# Altium PCB Rectangle.PcbDoc
Units mm, origin at the board's own origin, x right, y up, seen from the top; angles counter-clockwise.
Board outline 99.95 x 57.91 mm, 2 copper layers (Top Layer, Bottom Layer); 6 components, 22 nets, 52 pads, 26 vias.
Unrouted connection lines stored in the file: 2.
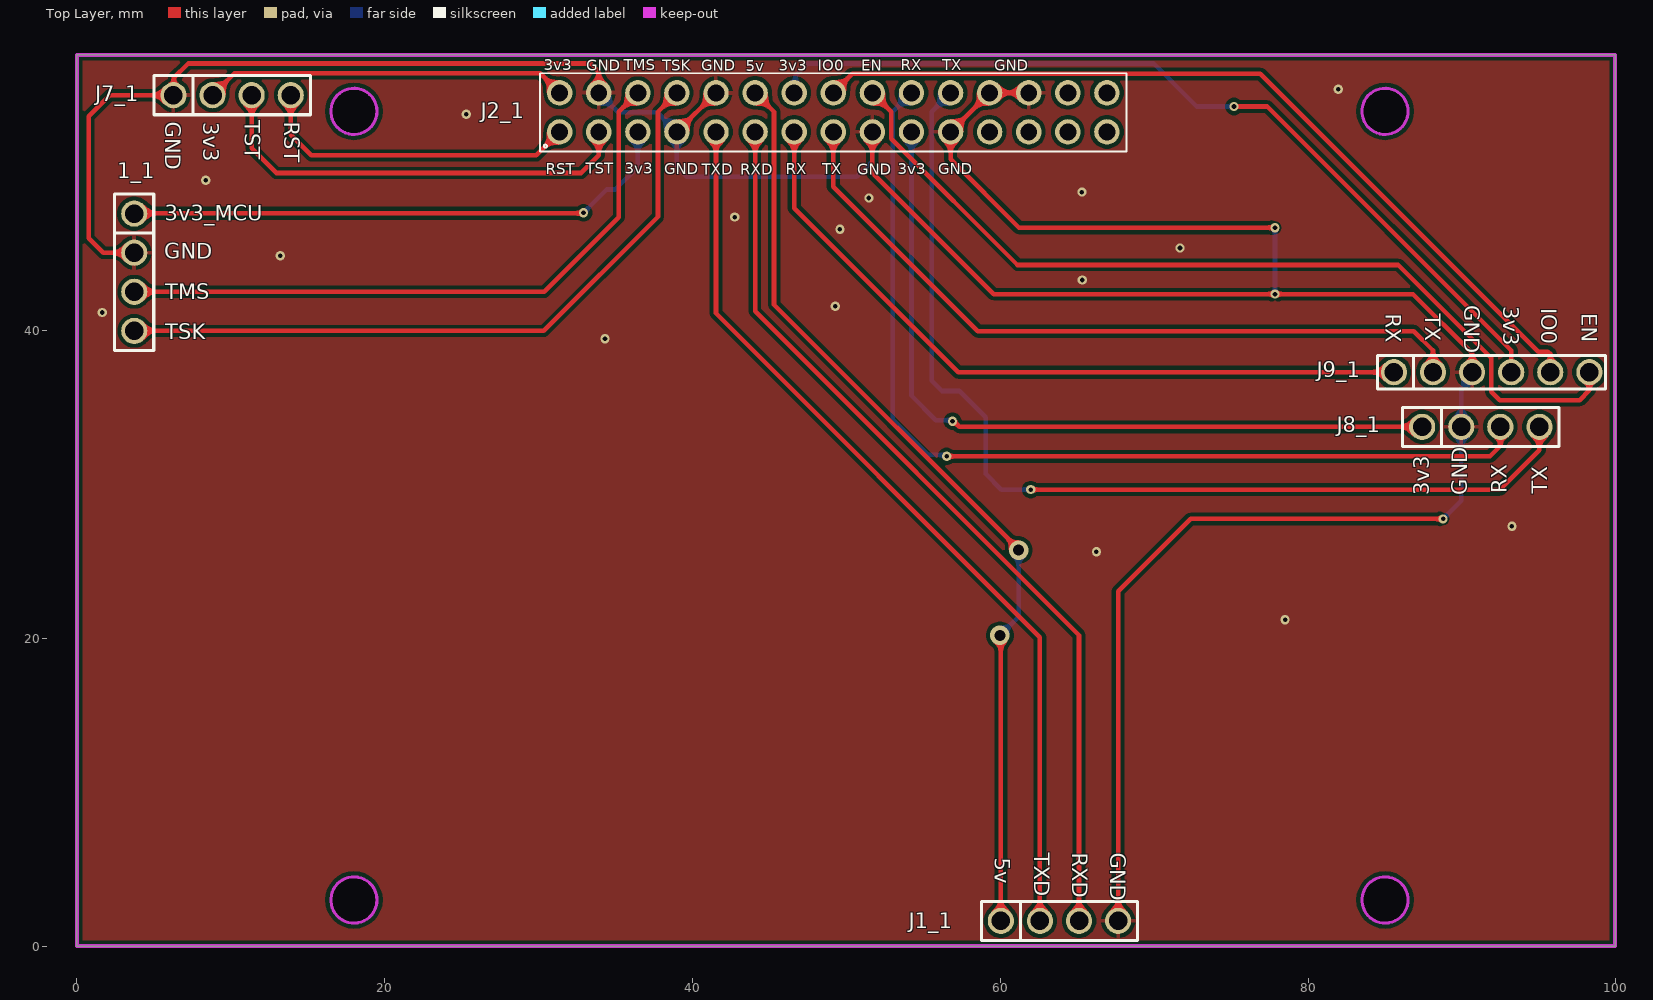
[diagram p0: Top Layer view]
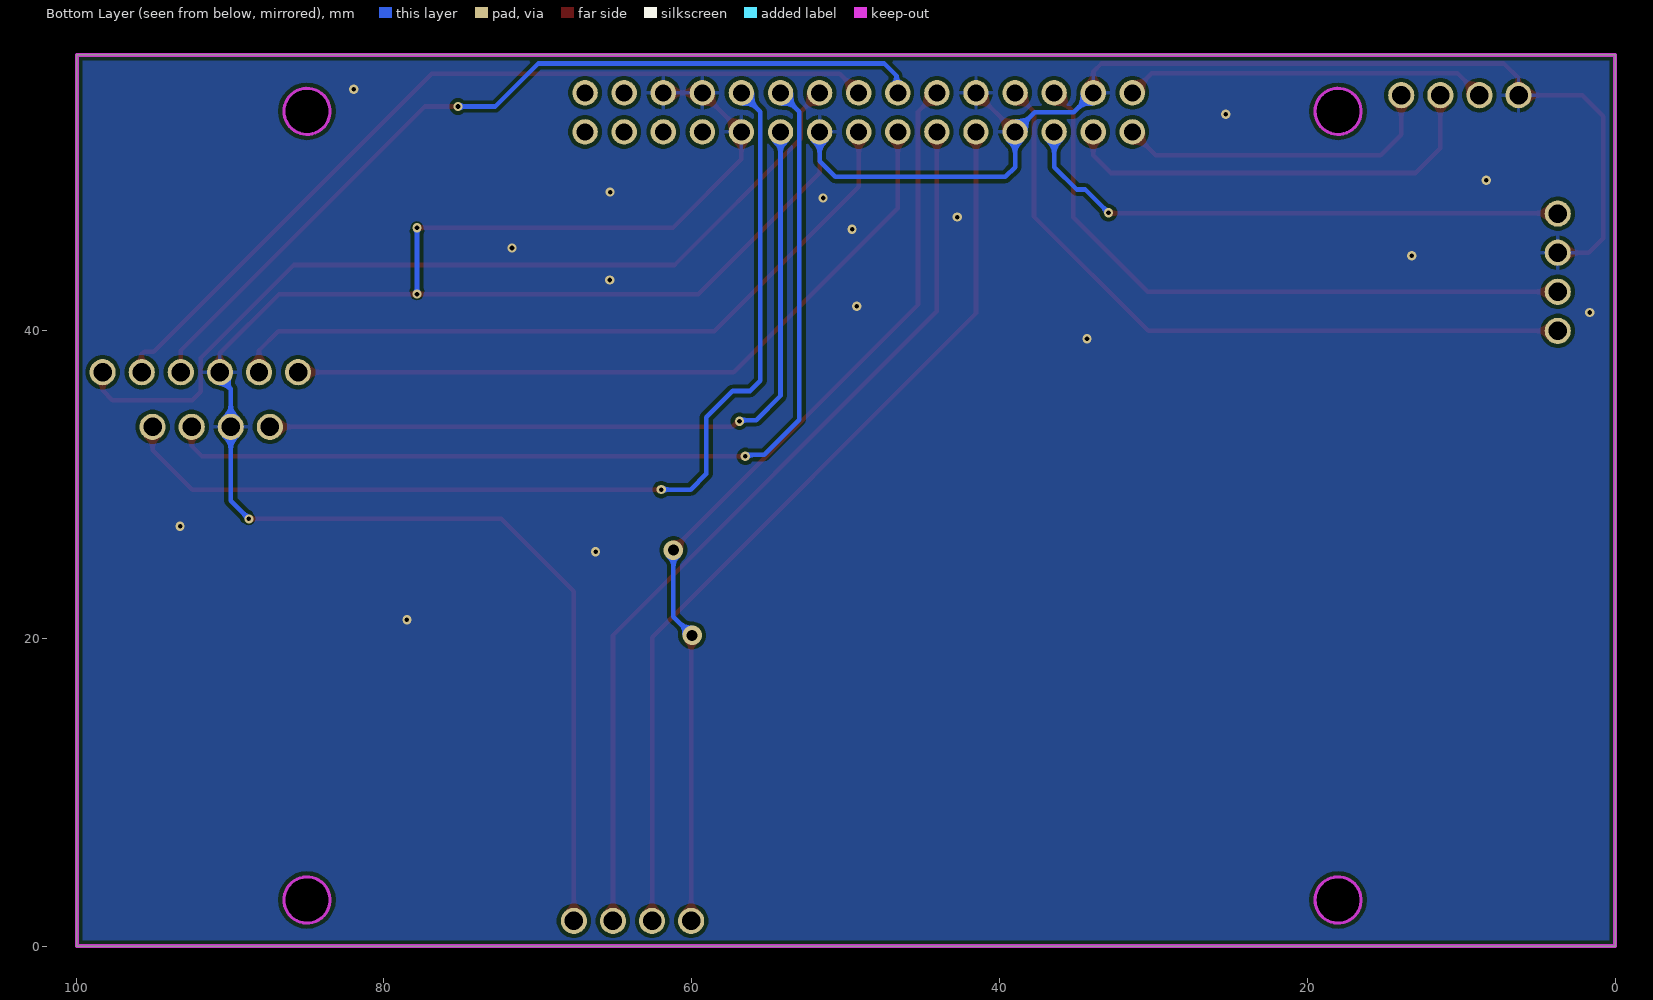
[diagram p1: Bottom Layer view, seen from below]

## Layer stack, top to bottom
Top Solder: solder mask 0.0102, Solder Resist, Dk 3.5
Top Layer: signal copper 0.0356
Dielectric 1: dielectric 0.32, FR-4, Dk 4.8
Bottom Layer: signal copper 0.0356
Bottom Solder: solder mask 0.0102, Solder Resist, Dk 3.5

## Board outline
0,0 0,57.912 99.949,57.912 99.949,0
cut-out: 18,52.745 cw(c18,54.245) 16.5,54.245 cw(c18,54.245) 18,55.745 cw(c18,54.245) 19.5,54.245 cw(c18,54.245)
cut-out: 16.5,3 ccw(c18,3) 18,1.5 ccw(c18,3) 19.5,3 ccw(c18,3) 18,4.5 ccw(c18,3)
cut-out: 83.5,54.245 ccw(c85,54.245) 85,52.745 ccw(c85,54.245) 86.5,54.245 ccw(c85,54.245) 85,55.745 ccw(c85,54.245)
cut-out: 83.5,3 ccw(c85,3) 85,1.5 ccw(c85,3) 86.5,3 ccw(c85,3) 85,4.5 ccw(c85,3)

## Design rules (kind name [scope] priority, off if disabled: settings)
Clearance [All] p1: gap=0.254 ignorepadtopadclearanceinfootprint=FALSE except(0: Arc-Hole Track-Hole SMDPad-Hole THPad-Hole Via-Hole Fill-Hole Poly-Hole Region-Hole Text-Hole)
PolygonConnect [All] p1: thpad.connectstyle=Relief thpad.reliefconductorwidth=0.254 thpad.reliefentries=4 thpad.polygonreliefangle="90 Angle" thpad.airgapwidth=0.254 smdpad.connectstyle=Relief smdpad.reliefconductorwidth=0.254 smdpad.reliefentries=4 smdpad.polygonreliefangle="90 Angle" smdpad.airgapwidth=0.254 via.connectstyle=Direct via.reliefconductorwidth=0.254 via.reliefentries=4 via.polygonreliefangle="90 Angle" via.airgapwidth=0.254
RoutingVias [All] p1: holewidth=0.711 width=1.27 viastyle="Through Hole" minholewidth=0.711 minwidth=1.27 maxholewidth=0.711 maxwidth=1.27
SolderMaskExpansion [All] p1: expansion=0.102 istentingtop=FALSE
Width [All] p1: maxlimit=1 minlimit=0.3 preferedwidth=0.3
30 further rules are at their usual default settings.

## Classes and differential pairs
component class Sheet1: J0 U1

## Components (designator, comment, footprint, x,y, rotation, side; value= is the part's Value field where it differs from the comment)
1_1 "J" J4 3.726,47.598 r270 top
J1_1 "J" J4 60.036,1.643 r0 top
J2_1 "61303021121" 61303021121 49.149,54.178 r0 top
J7_1 "J" J4 6.276,55.293 r0 top
J8_1 "J" J4 87.411,33.743 r0 top
J9_1 "J" J6 85.576,37.293 r0 top

## Footprints (in the part's own frame and the unit in brackets; to place one, negate y for a bottom-side part, rotate by r counter-clockwise, add the part's x,y. Pads: shape width x height; smd on the part's side, far side on the other; paste and mask are expansions set on the pad)
61303021121 [mm]
  round 1.65 hole 1.1: 1(-17.78,-1.27) 2(-17.78,1.27) 3(-15.24,-1.27) 4(-15.24,1.27) 5(-12.7,-1.27) 6(-12.7,1.27) 7(-10.16,-1.27) 8(-10.16,1.27) 9(-7.62,-1.27) 10(-7.62,1.27) 11(-5.08,-1.27) 12(-5.08,1.27) 13(-2.54,-1.27) 14(-2.54,1.27) 15(0,-1.27) 16(0,1.27) 17(2.54,-1.27) 18(2.54,1.27) 19(5.08,-1.27) 20(5.08,1.27) 21(7.62,-1.27) 22(7.62,1.27) 23(10.16,-1.27) 24(10.16,1.27) 25(12.7,-1.27) 26(12.7,1.27) 27(15.24,-1.27) 28(15.24,1.27) 29(17.78,-1.27) 30(17.78,1.27)
  silkscreen extent -19.05,-2.54 19.05,2.54
J4 [mm]
  round 1.7 hole 1.2: 1(0,0) 2(2.54,0) 3(5.08,0) 4(7.62,0)
  Bottom Layer lines w0.3: 7.617,0.09 7.617,0.284
  Bottom Layer lines w0.4: -0.033,0.065 0,0.099
  silkscreen extent -1.27,-1.27 8.89,1.27
J6 [mm]
  round 1.7 hole 1.2: 1(0,0) 2(2.54,0) 3(5.08,0) 4(7.62,0) 5(10.16,0) 6(12.7,0)
  Top Layer lines w0.2: 10.182,0.103 10.16,0.125 10.182,0.103 ; 10.182,0.103 10.223,0.063 ; 10.182,0.103 10.223,0.063 ; 10.223,0.063 10.277,0.008 10.223,0.063 ; 10.223,0.063 10.223,0.063 ; 10.223,0.063 10.223,0.063 ; 12.727,0 12.727,-0.042 12.727,0 ; 12.727,0 12.727,0.015 12.727,0
  silkscreen extent -1.07,-1.09 13.74,1.09

## Part data
1_1 J1_1 J7_1 J8_1: library part J4
J2_1: "<b> WR-PHD 2.54mm Dual Pin Header, 30 Pins </b>=>Code : Con_BTB_PHD_2.54_2_61303021121 <br><a href=\"http://katalog.we-online.de/media/images/eican/Con_BTB_PHD_2.54_2_6130xx21121_pf2.jpg\" title=\"Enlarge picture\"> <img src=\"http://katalog.we-online.de/media/thumbs2/eican/thb_Con_BTB_PHD_2.54_2_6130xx21121_pf2.jpg\" width=\"320\"></a><p> Details see: <a href=\"http://katalog.we-online.de/en/em/613_0xx_211_21\">http://katalog.we-online.de/en/em/613_0xx_211_21</a><p> Created 2014-05-29, Karrer Zheng<br> 2014 (C) WÃ¼rth Elektronik", Package=None, Availability=Unavailable, MF="{'manufacturer': u'Wurth Elektronik'}", MP=61303021121, Price=None
J9_1: library part J6

## Via types
v1: diameter 0.6, hole 0.3, Top Layer to Bottom Layer, tented both sides, 24 vias
v2: diameter 1.27, hole 0.711, Top Layer to Bottom Layer, tented both sides, 2 vias

## Nets (pads, with @x,y where several pads share a name; then routed paths per layer and width w, separated by ;. In a path a pad name is that pad's centre, name@x,y a point inside that pad or via, vN(x,y) a via of type N, cw(c..) or ccw(c..) an arc to the next point about the centre after c; other vN are vias at no path point)
3V3: J2_1.2 J2_1.14 J2_1.19 J7_1.2 J8_1.1 J9_1.4 | length 132
  Top Layer w0.3: J7_1.2 10.241,56.718 30.099,56.718 J2_1.2 ; v1@56.921,34.138 v1(56.896,34.112) 56.977,34.112 57.346,33.743 J8_1.1 ; v1(75.184,54.559) 77.343,54.559 93.196,38.706 J9_1.4
  Bottom Layer w0.3: J2_1.14 46.692,55.531 46.692,56.547 47.498,57.353 69.977,57.353 72.771,54.559 v1(75.184,54.559) ; J2_1.19 54.229,35.763 55.811,34.181 56.827,34.181 v1(56.896,34.112)
3V3_MCU: 1_1.1 J2_1.5 | length 36.3
  Top Layer w0.3: 1_1.1 3.752,47.624 32.892,47.624 v1(32.918,47.65)
  Bottom Layer w0.3: v1(32.918,47.65) 34.433,49.165 34.992,49.165 36.449,50.622 J2_1.5
+5: J1_1.1 J2_1.12 | length 61.4
  Top Layer w0.3: J2_1.12 45.298,54.219 45.298,41.672 61.189,25.781 v2(61.189,25.73) ; v2(59.969,20.193) 60.036,20.126 J1_1.1
  Bottom Layer w0.3: v2(59.969,20.193) 61.189,21.412 v2(61.189,25.73)
EN_J9: J2_1.18 J9_1.6 | length 58.6
  Top Layer w0.3: J2_1.18 52.918,54.219 52.918,52.463 61.119,44.261 67.945,44.261 85.863,44.261 91.91,38.214 91.91,36.03 92.456,35.484 97.639,35.484 98.276,36.121 J9_1.6
GND: 1_1.2 J1_1.4 J2_1.4 J2_1.7 J2_1.10 J2_1.17 J2_1.21 J2_1.24 J2_1.26 J7_1.1 J8_1.2 J9_1.3 | length 213
  Top Layer w0.3: 1_1.2 1.7,45.058 0.762,45.997 0.762,53.915 2.14,55.293 J7_1.1 6.303,55.32 6.303,56.417 7.239,57.353 33.37,57.353 33.909,56.814 J2_1.4 ; J2_1.7 J2_1.10 ; J2_1.17 51.689,50.241 59.563,42.367 v1(77.851,42.367) 86.817,42.367 90.656,38.528 J9_1.3 ; J2_1.26 J2_1.24 J2_1.21 56.769,51.13 61.214,46.685 v1(77.851,46.685) ; J1_1.4 67.656,23.054 72.365,27.762 v1(88.773,27.762)
  Bottom Layer w0.3: J2_1.4 35.179,54.178 37.719,54.178 J2_1.7 38.989,50.622 39.624,49.987 50.673,49.987 51.689,51.003 J2_1.17 ; v1(77.851,42.367) v1(77.851,46.685) ; v1(88.773,27.762) 89.951,28.94 J8_1.2 89.951,36.209 90.656,36.914 J9_1.3
  other v1: 78.507,21.213 66.243,25.629 93.243,27.28 34.315,39.472 1.651,41.173 49.276,41.58 65.329,43.282 13.208,44.856 71.679,45.364 49.581,46.584 42.748,47.371 51.46,48.616 65.303,48.997 8.372,49.766 25.298,54.051 81.966,55.677
IO0_J9: J2_1.16 J9_1.5 | length 55.8
  Top Layer w0.3: J2_1.16 50.378,56.677 76.901,56.677 82.296,51.283 94.945,38.633 95.582,38.633 95.758,38.458 95.758,37.397 95.758,37.315 J9_1.5
NetJ2_1_23: J2_1.23
NetJ2_1_25: J2_1.25
NetJ2_23: 
NetJ2_25: 
NetLabel1: 
NetLabel2: 
RST_J7: J2_1.1 J7_1.4 | length 21.2
  Top Layer w0.3: J7_1.4 13.896,52.728 15.24,51.384 29.845,51.384 J2_1.1
RX_J8: J2_1.20 J8_1.3 | length 63.8
  Top Layer w0.3: v1(56.515,31.826) 91.821,31.826 92.491,32.496 J8_1.3
  Bottom Layer w0.3: J2_1.20 53,54.219 53,34.198 55.28,31.918 56.423,31.918 v1(56.515,31.826)
RX_J9: J2_1.13 J9_1.1 | length 48.3
  Top Layer w0.3: J2_1.13 46.609,47.955 57.271,37.293 J9_1.1
RXD_J1: J1_1.3 J2_1.11 | length 60
  Top Layer w0.3: J2_1.11 44.069,41.25 65.116,20.203 J1_1.3
TMS: 1_1.3 J2_1.6 | length 42.1
  Top Layer w0.3: 1_1.3 30.377,42.518 35.22,47.361 35.22,54.219 J2_1.6
TSK: 1_1.4 J2_1.8 | length 45.7
  Top Layer w0.3: 1_1.4 30.332,39.978 37.76,47.406 37.76,54.219 J2_1.8
TST_J7: J2_1.3 J7_1.3 | length 28.7
  Top Layer w0.3: J7_1.3 11.356,51.839 12.954,50.241 32.766,50.241 33.909,51.384 J2_1.3
TX_J8: J2_1.22 J8_1.4 | length 66.4
  Top Layer w0.3: v1(61.976,29.667) 92.464,29.667 95.031,32.234 J8_1.4
  Bottom Layer w0.3: J2_1.22 55.54,54.219 55.54,36.738 56.202,36.076 57.345,36.076 59.055,34.366 59.055,30.683 60.071,29.667 v1(61.976,29.667)
TX_J9: J2_1.15 J9_1.2 | length 48.3
  Top Layer w0.3: J2_1.15 49.149,49.352 58.547,39.954 86.866,39.954 88.116,38.704 J9_1.2
TXD_J1: J1_1.2 J2_1.9 | length 60
  Top Layer w0.3: J2_1.9 41.529,41.123 62.576,20.076 J1_1.2
pads on no net: J2_1.27 J2_1.28 J2_1.29 J2_1.30

## Polygon pours and split planes (outlines as drawn)
GND on Top Layer "GND_L01_P000" (solid, pour order 0): 0.025,57.937 99.949,57.937 99.949,0 0,0
GND on Bottom Layer "GND_L02_P001" (solid, pour order 1): 0.025,57.937 99.949,57.937 99.949,0 0,0

## Keep-outs
Keep-Out Layer:
  circle w0.2: c18,3 r1.5
  circle w0.2: c18,54.245 r1.5
  circle w0.2: c85,54.245 r1.5
  circle w0.2: c85,3 r1.5
  lines w0.254: 0,0 0,57.912 99.949,57.912 99.949,0 0,0

## Silkscreen, mask and mechanical layers (free items; w line width, h text height)
Top Overlay:
  text "3v3" at 30.328,56.921 h0.7
  text "TMS" at 35.535,56.921 h0.7
  text "RX" at 53.543,56.921 h0.7
  text "TX" at 56.236,56.921 h0.7
  text "GND" at 33.096,56.896 h0.7
  text "IO0" at 48.133,56.896 h0.7
  text "EN" at 50.978,56.896 h0.7
  text "GND" at 59.614,56.896 h0.7
  text "TSK" at 38.049,56.871 h0.7
  text "GND" at 40.564,56.871 h0.7
  text "3v3" at 45.618,56.871 h0.7
  text "5v" at 43.459,56.845 h0.7
  text "TST" at 10.897,53.67 h1 r270
  text "GND" at 5.74,53.569 h1 r270
  text "RST" at 13.462,53.569 h1 r270
  text "3v3" at 8.204,53.543 h1 r270
  text "TST" at 33.071,50.19 h0.7
  text "3v3" at 35.585,50.19 h0.7
  text "RST" at 30.455,50.165 h0.7
  text "GND" at 38.151,50.165 h0.7
  text "RX" at 46.05,50.165 h0.7
  text "TX" at 48.438,50.165 h0.7
  text "3v3" at 53.34,50.165 h0.7
  text "GND" at 55.956,50.165 h0.7
  text "TXD" at 40.589,50.14 h0.7
  text "RXD" at 43.104,50.14 h0.7
  text "GND" at 50.698,50.14 h0.7
  text "3v3_MCU" at 5.707,47.134 h1
  text "GND" at 5.681,44.656 h1
  text "TMS" at 5.732,42.04 h1
  text "GND" at 90.158,41.642 h1 r270
  text "3v3" at 92.673,41.566 h1 r270
  text "IO0" at 95.162,41.465 h1 r270
  text "EN" at 97.778,41.109 h1 r270
  text "RX" at 85.053,41.084 h1 r270
  text "TX" at 87.618,41.084 h1 r270
  text "TSK" at 5.732,39.449 h1
  text "RX" at 92.913,29.439 h1 r90
  text "TX" at 95.555,29.388 h1 r90
  text "3v3" at 87.859,29.286 h1 r90
  text "GND" at 90.348,29.286 h1 r90
  text "GND" at 67.148,6.085 h1 r270
  text "TXD" at 62.195,6.059 h1 r270
  text "RXD" at 64.684,6.059 h1 r270
  text "5v" at 59.629,5.729 h1 r270